# Altium PCB CPU_PCB1.PcbDoc
Units mil, origin at the board's own origin, x right, y up, seen from the top; angles counter-clockwise.
Board outline 1775 x 1235 mil, 2 copper layers (Top Layer, Bottom Layer); 13 components, 48 nets, 106 pads, 21 vias.
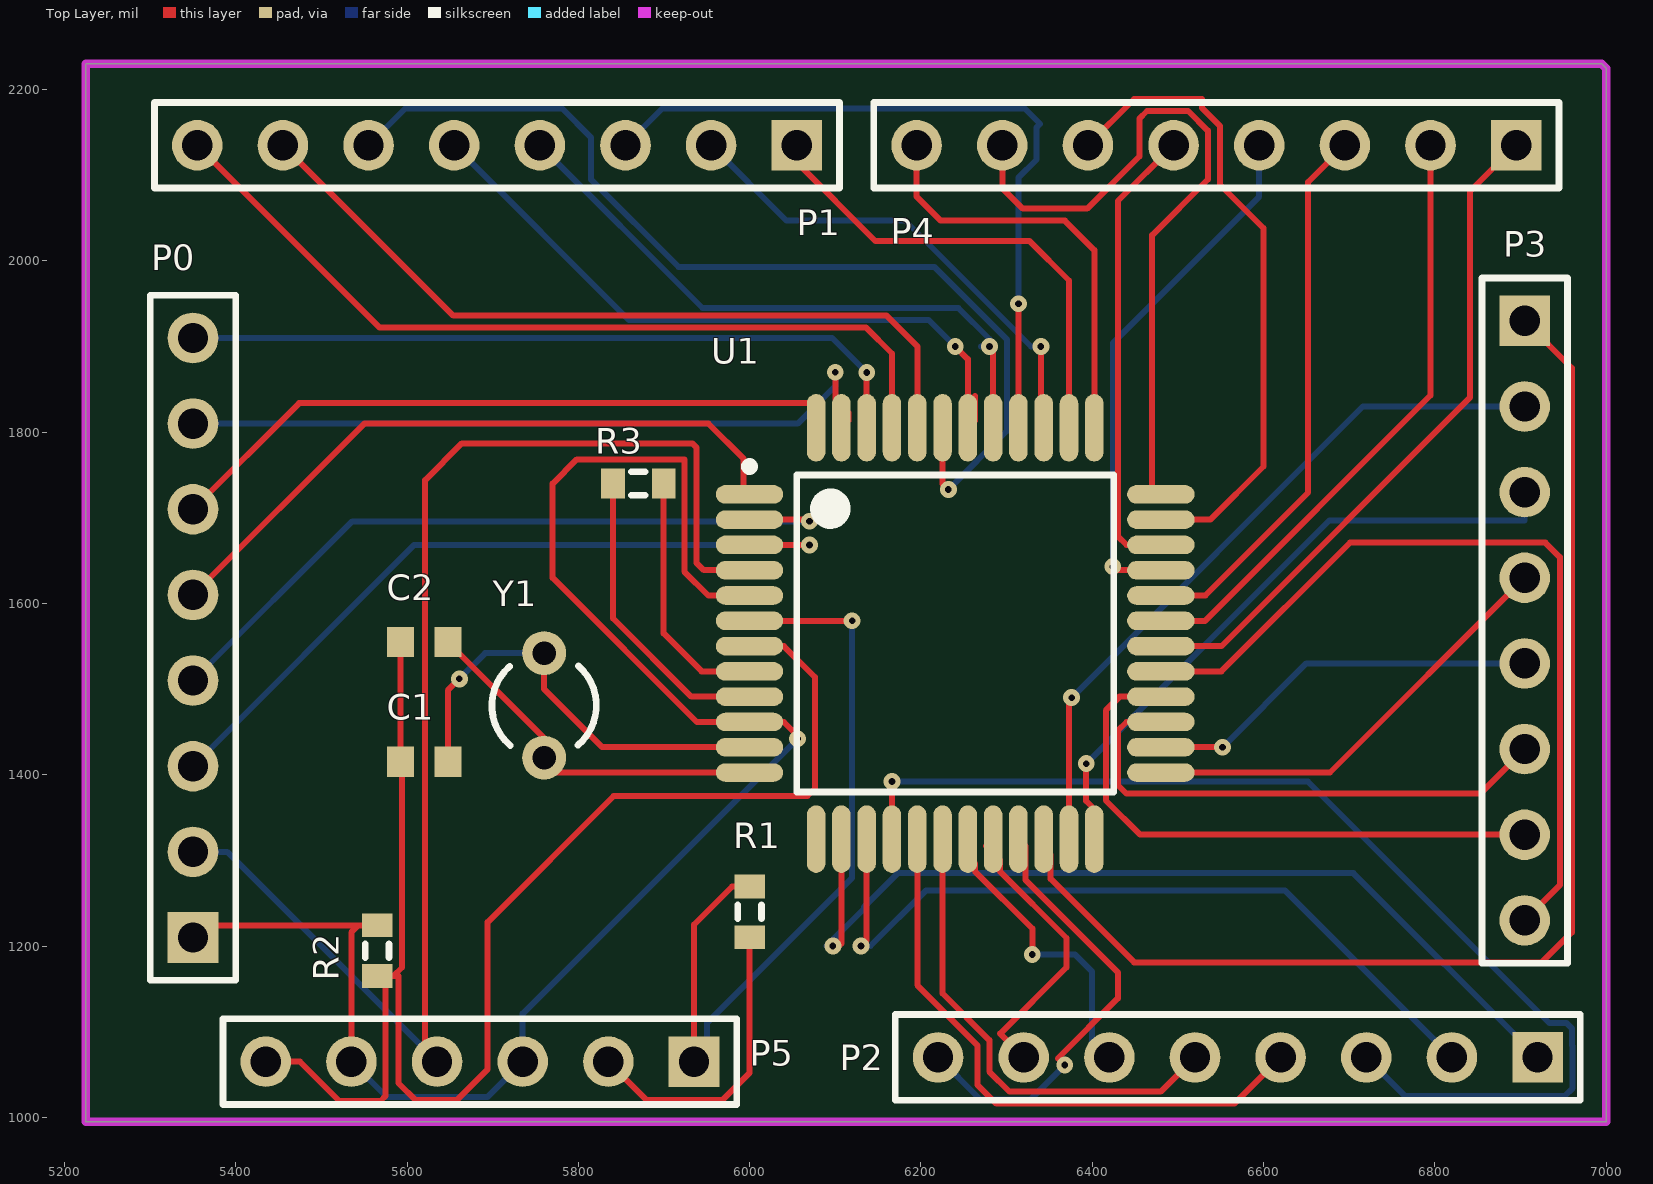
[diagram p0: Top Layer view]
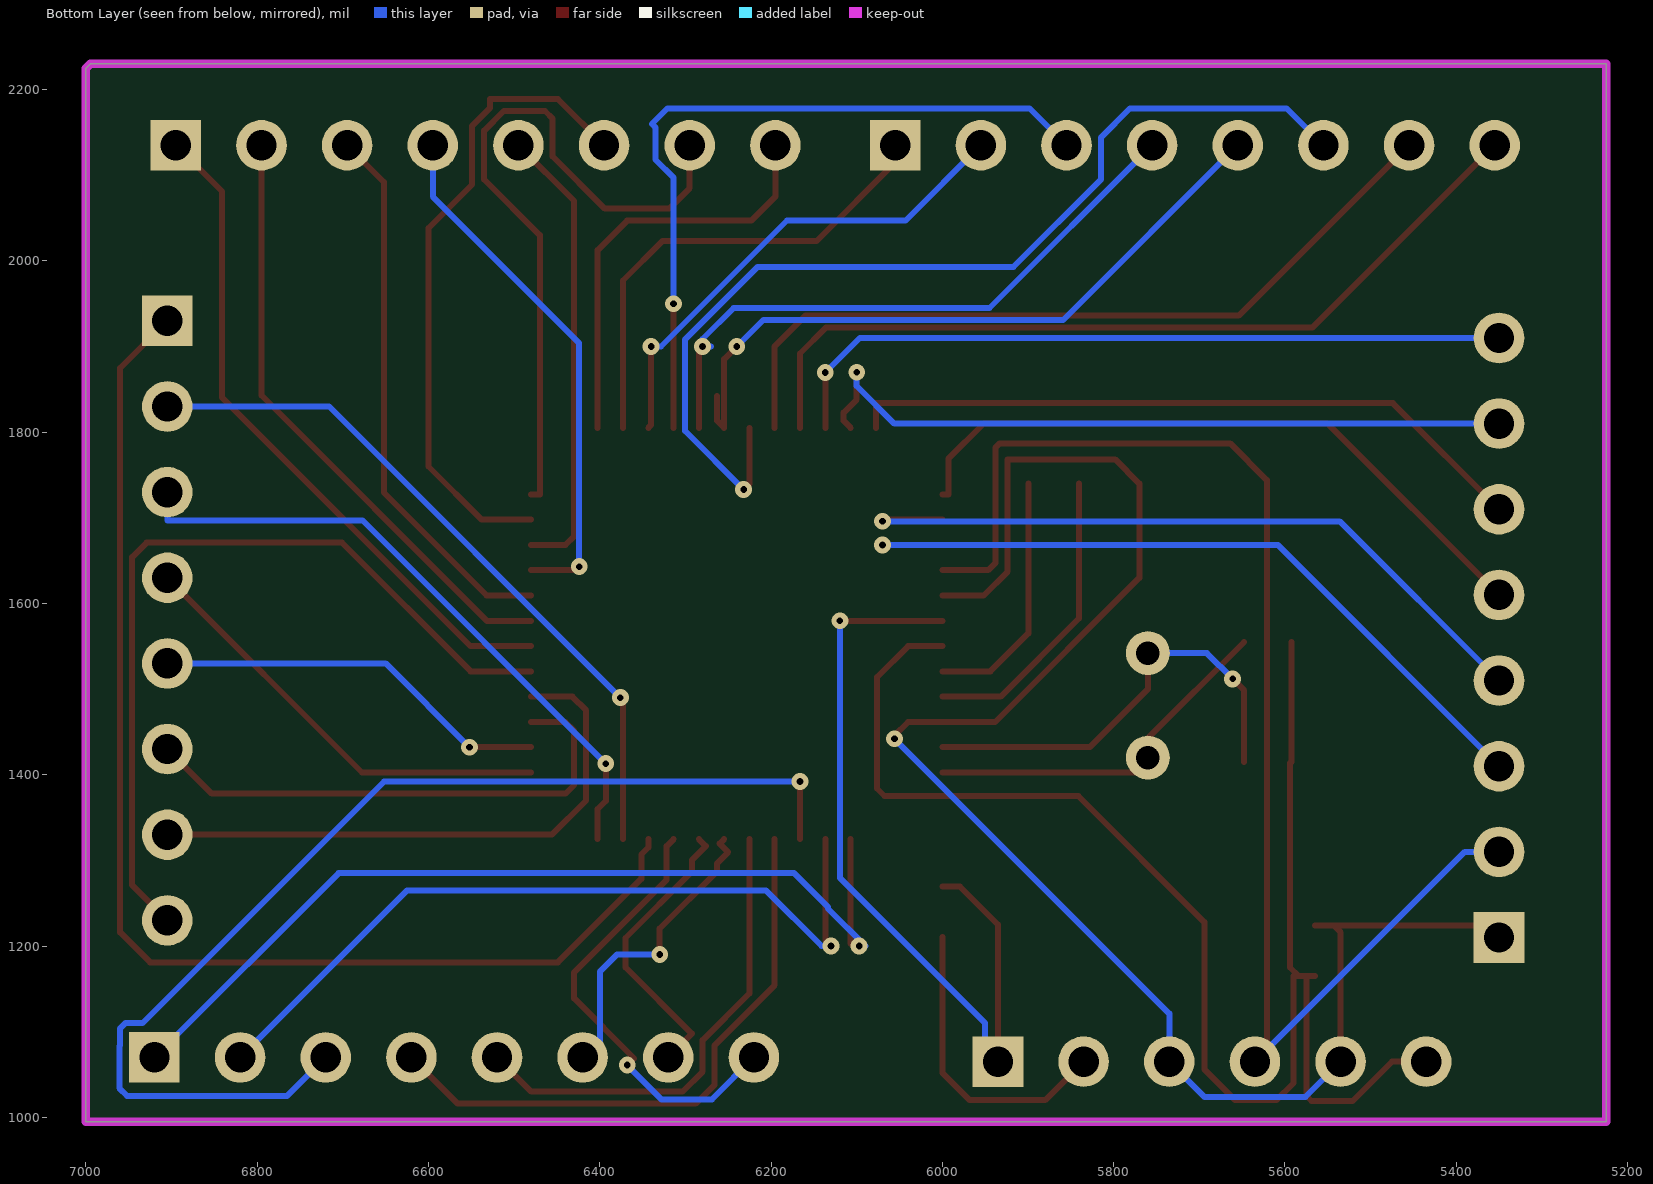
[diagram p1: Bottom Layer view, seen from below]

## Layer stack, top to bottom
Top Solder: solder mask 0.4, Solder Resist, Dk 3.5
Top Layer: signal copper 1.4
Dielectric 1: dielectric 12.6, FR-4, Dk 4.8
Bottom Layer: signal copper 1.4
Bottom Solder: solder mask 0.4, Solder Resist, Dk 3.5

## Board outline
5225,995 7000,995 7000,2225 6995,2230 5225,2230

## Design rules (kind name [scope] priority, off if disabled: settings)
Clearance [All] p1: gap=7
PolygonConnect [All] p1: connectstyle=Relief reliefconductorwidth=10 reliefentries=4 polygonreliefangle="90 Angle" airgapwidth=10
RoutingVias [All] p1: holewidth=7.87 width=19.68 viastyle="Through Hole" minholewidth=7.87 minwidth=19.68 maxholewidth=7.87 maxwidth=19.68
SolderMaskExpansion [All] p1: expansion=4
Width [All] p1: maxlimit=20 minlimit=6 preferedwidth=7
30 further rules are at their usual default settings.

## Components (designator, comment, footprint, x,y, rotation, side; value= is the part's Value field where it differs from the comment)
C1 "Cap Semi" 1608[0603] 5620,1415 r0 top
C2 "Cap Semi" 1608[0603] 5620,1555 r0 top
P0 "Header 8" HDR1X8 5350,1210 r90 top
P1 "Header 8" HDR1X8 6055,2135 r180 top
P2 "Header 8" HDR1X8 6920,1070 r180 top
P3 "Header 8" HDR1X8 6905,1930 r270 top
P4 "Header 8" HDR1X8 6895,2135 r180 top
P5 "Header 6" HDR1X6 5935,1065 r180 top
R1 "Res3" J1-0603 6000,1240 r90 top
R2 "Res3" J1-0603 5565,1194.53 r90 top
R3 "Res3" J1-0603 5870,1740 r0 top
U1 "S3F8S19" QFP75P1335X1335X230-48N 6240,1565 r0 top
Y1 "XTAL" R38 5760,1481.02 r0 top

## Footprints (in the part's own frame and the unit in brackets; to place one, negate y for a bottom-side part, rotate by r counter-clockwise, add the part's x,y. Pads: shape width x height; smd on the part's side, far side on the other; paste and mask are expansions set on the pad)
1608[0603] [mm] "Chip Capacitor, Body 1.6x0.8mm, IPC High Density"
  rect 0.8x0.9 smd: 1(-0.7,0) 2(0.7,0)
  body extent -0.87,-0.48 0.87,0.48, height 1.3
HDR1X6 [mm] "Connector; Header; 6 Position"
  rect 1.5x1.5 hole 0.9: 1(0,0)
  round 1.5 hole 0.9: 2(2.54,0) 3(5.08,0) 4(7.62,0) 5(10.16,0) 6(12.7,0)
  silkscreen extent -1.27,-1.27 13.97,1.27
HDR1X8 [mm] "Connector; Header; 8 Position"
  rect 1.5x1.5 hole 0.9: 1(0,0)
  round 1.5 hole 0.9: 2(2.54,0) 3(5.08,0) 4(7.62,0) 5(10.16,0) 6(12.7,0) 7(15.24,0) 8(17.78,0)
  silkscreen extent -1.27,-1.27 19.05,1.27
J1-0603 [mm] "Chip Resistor, Body 1.6x0.8mm, IPC High Density"
  rect 0.7x0.9 smd: 1(-0.75,0) 2(0.75,0)
  silkscreen extent -0.2,-0.35 0.2,0.35, body extent -0.85,-0.48 0.85,0.48, height 0.9
QFP75P1335X1335X230-48N [mm] "QFP, 48-Leads, Body 10.00x10.00mm, Pitch 0.75mm, IPC Medium Density"
  oval 2x0.55 smd: 1(-6.1,4.125) 2(-6.1,3.375) 3(-6.1,2.625) 4(-6.1,1.875) 5(-6.1,1.125) 6(-6.1,0.375) 7(-6.1,-0.375) 8(-6.1,-1.125) 9(-6.1,-1.875) 10(-6.1,-2.625) 11(-6.1,-3.375) 12(-6.1,-4.125) 25(6.1,-4.125) 26(6.1,-3.375) 27(6.1,-2.625) 28(6.1,-1.875) 29(6.1,-1.125) 30(6.1,-0.375) 31(6.1,0.375) 32(6.1,1.125) 33(6.1,1.875) 34(6.1,2.625) 35(6.1,3.375) 36(6.1,4.125)
  oval 0.55x2 smd: 13(-4.125,-6.1) 14(-3.375,-6.1) 15(-2.625,-6.1) 16(-1.875,-6.1) 17(-1.125,-6.1) 18(-0.375,-6.1) 19(0.375,-6.1) 20(1.125,-6.1) 21(1.875,-6.1) 22(2.625,-6.1) 23(3.375,-6.1) 24(4.125,-6.1) 37(4.125,6.1) 38(3.375,6.1) 39(2.625,6.1) 40(1.875,6.1) 41(1.125,6.1) 42(0.375,6.1) 43(-0.375,6.1) 44(-1.125,6.1) 45(-1.875,6.1) 46(-2.625,6.1) 47(-3.375,6.1) 48(-4.125,6.1)
  silkscreen extent -6.22,-4.7 4.7,5.07, body extent -5,-5 5,5, height 2.3
R38 [mm] "Crystal, Thru-Hole; 2 Leads; Body 3.1 x 8.2 mm (Dia.xH)"
  round 1.3 hole 0.7: 1(0,1.55) 2(0,-1.55)
  silkscreen extent -1.55,-1.19 1.55,1.17

## Part data
C1 C2: "Capacitor (Semiconductor SIM Model)"
P0 P1 P2 P3 P4: "Header, 8-Pin"
P5: "Header, 6-Pin"
R1 R2 R3: "Resistor"
Y1: "Crystal Oscillator"

## Via types
v1: diameter 19.68, hole 7.87, Top Layer to Bottom Layer, 21 vias

## Nets (pads, with @x,y where several pads share a name; then routed paths per layer and width w, separated by ;. In a path a pad name is that pad's centre, name@x,y a point inside that pad or via, vN(x,y) a via of type N, cw(c..) or ccw(c..) an arc to the next point about the centre after c; other vN are vias at no path point)
BUZZER: P0.1 P5.3 P5.5 R2.2 U1.5 U1.10 | length 1987.3
  Top Layer w7: P0.1 5364.06,1224.06 5543.06,1224.06 ; P5.5 5535,1216 5543.06,1224.06 ; R2.2 5543.06,1224.06 ; U1.5 5951.71,1609.29 5923.81,1637.19 5923.81,1768.22 5798.22,1768.22 5770,1740 5770,1630 5938.35,1461.65 U1.10 6040,1461.65 6056,1445.65 v1(6056,1442)
  Bottom Layer w7: P5.5 5576,1024 5694,1024 P5.3 5735,1121 v1(6056,1442)
GND: C1.1 C2.1 P5.6 R2.1 U1.7 | length 1813.9
  Top Layer w7: P5.6 5475,1065 5521,1019 5569,1019 5575.03,1025.03 R2.1@5575.03,1165 ; R2.1 R2.1@5575.03,1165 ; C2.1 C1.1 5594,1413.44 5594,1175 5584,1165 ; U1.7 6040,1550.24 6076.34,1513.89 6076.34,1384 6067.51,1375.16 5841.16,1375.16 5694,1228 5694,1056 5658,1020 5610,1020 5590,1040 5590,1165 5584,1165 ; R2.1@5575.03,1165 5584,1165
NetP0_6: P0.6 U1.48 | length 807.8
  Top Layer w7: P0.6 5474,1834 6077.6,1834 U1.48
NetP0_7: P0.7 U1.47 | length 858.9
  Top Layer w7: v1(6100,1870) 6100,1838.03 6115.33,1822.7 6115.33,1813.36 U1.47
  Bottom Layer w7: P0.7 6056.13,1810 6100,1853.87 v1(6100,1870)
NetP0_8: P0.8 U1.46 | length 867.9
  Top Layer w7: U1.46 v1(6136.65,1869.73)
  Bottom Layer w7: P0.8 6096.38,1910 v1(6136.65,1869.73)
NetP1_1: P1.1 U1.38 | length 567
  Top Layer w7: P1.1 6055,2115 6147,2023 6327,2023 6372.87,1977.13 U1.38
NetP1_2: P1.2 U1.39 | length 578.6
  Top Layer w7: v1(6340,1900) 6340,1808.5 U1.39
  Bottom Layer w7: P1.2 6042.77,2047.23 6181.33,2047.23 6328.57,1900 v1(6340,1900)
NetP1_3: P1.3 U1.40 | length 874.5
  Top Layer w7: U1.40 v1(6313.82,1950)
  Bottom Layer w7: P1.3 5898,2178 6321,2178 6339,2160 6335.03,2156.03 6335.03,2118.42 6313.82,2097.21 v1(6313.82,1950)
NetP1_4: P1.4 U1.41 | length 734.1
  Top Layer w7: v1(6280,1900) 6284.29,1895.71 U1.41
  Bottom Layer w7: P1.4 5945,1945 6243.77,1945 6280,1908.77 v1(6280,1900) 6270,1900
NetP1_5: P1.5 U1.42 | length 824.1
  Top Layer w7: v1(6240,1900) 6254.76,1885.24 U1.42 6262.97,1813.36 6262.97,1842.54
  Bottom Layer w7: P1.5 5859,1931 6209,1931 v1(6240,1900)
NetP1_6: P1.6 U1.43 | length 1182.2
  Top Layer w7: U1.43 6225.24,1739.76 v1(6232,1733)
  Bottom Layer w7: P1.6 5598,2178 5780.97,2178 5814.97,2144 5814.97,2094.97 5916.94,1993 6215.77,1993 6300.34,1908.43 6300.34,1801.34 v1(6232,1733)
NetP1_7: P1.7 U1.44 | length 933.1
  Top Layer w7: P1.7 5654,1936 6160.01,1936 6195.71,1900.31 U1.44
NetP1_8: P1.8 U1.45 | length 998.6
  Top Layer w7: P1.8 5568,1922 6136,1922 6166.18,1891.82 U1.45
NetP3_4: P3.4 U1.25 | length 519
  Top Layer w7: U1.25 6677.6,1402.6 P3.4
NetP3_5: P3.5 U1.26 | length 465.4
  Top Layer w7: U1.26 v1(6552.25,1432.13)
  Bottom Layer w7: v1(6552.25,1432.13) 6650.13,1530 P3.5
NetP3_6: P3.6 U1.27 | length 618.6
  Top Layer w7: U1.27 6440,1461.65 6430,1451.65 6430,1388 6440,1378 6853,1378 P3.6
NetP3_7: P3.7 U1.28 | length 681.6
  Top Layer w7: U1.28 6432,1491.18 6416,1475.18 6416,1369.95 6455.95,1330 P3.7
NetP3_8: P3.8 U1.29 | length 976.1
  Top Layer w7: U1.29 6550.71,1520.71 6701,1671 6929,1671 6946,1654 6946,1271 P3.8
NetP4_1: P4.1 U1.30 | length 798.1
  Top Layer w7: U1.30 6551,1550.24 6841,1840.24 6841,2081 P4.1
NetP4_2: P4.2 U1.31 | length 715.9
  Top Layer w7: U1.31 6531.76,1579.76 6795,1843 P4.2
NetP4_3: P4.3 U1.32 | length 645.1
  Top Layer w7: U1.32 6532,1609.29 6652,1729.29 6652,2092 P4.3
NetP4_4: P4.4 U1.33 | length 620.7
  Top Layer w7: v1(6424,1643) 6428.18,1638.82 U1.33
  Bottom Layer w7: v1(6424,1643) 6424,1904 6595,2075 P4.4
NetP4_5: P4.5 U1.34 | length 537.9
  Top Layer w7: U1.34 6440,1668.35 6430,1678.35 6430,2070 P4.5
NetP4_6: P4.6 U1.35 | length 759.8
  Top Layer w7: P4.6 6449.03,2189.03 6528,2189.03 6528,2178.83 6549.03,2157.8 6549.03,2089.2 6600,2038.23 6600,1760 6537.87,1697.87 U1.35
NetP4_7: P4.7 U1.36 | length 844.2
  Top Layer w7: P4.7 6295,2085 6319,2061 6394,2061 6454.97,2121.97 6454.97,2166 6464,2175.03 6512,2175.03 6535.03,2152 6535.03,2095 6470,2029.97 6470,1727.4 U1.36
NetP4_8: P4.8 U1.37 | length 500.7
  Top Layer w7: P4.8 6195,2075 6223,2047 6368,2047 6402.4,2012.6 U1.37
NetP5_2: P5.2 R1.1 | length 355.4
  Top Layer w7: P5.2 5880,1020 5968,1020 6000,1052 R1.1
NetR3_1: R3.1 U1.9 | length 354.6
  Top Layer w7: R3.1 5840.47,1582.72 5932.01,1491.18 U1.9
NetR3_2: R3.2 U1.8 | length 293.6
  Top Layer w7: R3.2 5899.53,1565.18 5944,1520.71 U1.8
NRESET: U1.13
P0.2: P0.3 U1.3 | length 897.2
  Top Layer w7: U1.3 v1(6070,1668.35)
  Bottom Layer w7: P0.3 5608.35,1668.35 v1(6070,1668.35)
P0.3: P0.4 U1.2 | length 868
  Top Layer w7: U1.2 6068.13,1697.87 v1(6070,1696)
  Bottom Layer w7: P0.4 5536,1696 v1(6070,1696)
P0.4: P0.5 U1.1 | length 791.3
  Top Layer w7: P0.5 5550,1810 5952,1810 5993,1769 5993,1727.4 U1.1
P2.0.0: P2.1 U1.14 | length 1095.6
  Top Layer w7: v1(6097.13,1200) 6104.25,1200 6107.13,1202.87 U1.14
  Bottom Layer w7: v1(6097.13,1200) 6090.2,1200 6090,1200.2 6133.66,1243.86 6133.66,1245.66 6173,1285 6705,1285 P2.1
P2.0.1: P2.2 U1.15 | length 925.3
  Top Layer w7: v1(6130,1200) 6136.65,1206.65 U1.15
  Bottom Layer w7: v1(6130,1200) 6141,1200 6206,1265 6625,1265 P2.2
P2.0.2: P2.3 U1.16 | length 1314.2
  Top Layer w7: U1.16 v1(6166.18,1392.13)
  Bottom Layer w7: v1(6166.18,1392.13) 6651.87,1392.13 6933.97,1110.03 6953.88,1110.03 6960.03,1103.88 6960.03,1083.97 6961,1083 6961,1034 6952,1025 6765,1025 P2.3
P2.0.3: P2.4 U1.17 | length 701.5
  Top Layer w7: U1.17 6195.71,1154.29 6265.97,1084.03 6265.97,1038 6288,1015.97 6565.97,1015.97 P2.4
P2.0.4: P2.5 U1.18 | length 560.4
  Top Layer w7: U1.18 6225.24,1144.76 6279.97,1090.03 6279.97,1053.42 6303.42,1029.97 6479.97,1029.97 P2.5
P2.0.5: P2.6 U1.19 | length 366.7
  Top Layer w7: U1.19 6260,1319.61 6250,1309.61 6262.97,1296.64 6262.97,1287.46 6330,1220.43 v1(6330,1190)
  Bottom Layer w7: v1(6330,1190) 6380,1190 6400,1170 6400,1070 P2.6@6410,1060
P2.0.6: P2.7 U1.20 | length 340.6
  Top Layer w7: U1.20 6276.09,1316.64 6292.49,1300.24 6292.49,1286.91 6370,1209.4 6370,1175.22 6292.49,1097.71 6320,1070.2 P2.7
P2.0.7: P2.8 U1.21 | length 529.1
  Top Layer w7: U1.21 6322.02,1316.64 6322.02,1277.18 6430,1169.2 6430,1138.94 6360.03,1068.97 v1(6368,1061)
  Bottom Layer w7: P2.8 6269,1021 6328,1021 v1(6368,1061)
"P3 0": P3.1 U1.22 | length 1449.9
  Top Layer w7: U1.22 6343.35,1315.11 6351.55,1306.91 6351.55,1278.45 6449,1181 6925,1181 6960,1216 6960,1875 P3.1
"P3 1": P3.2 U1.23 | length 836.5
  Top Layer w7: U1.23 6372.87,1392.44 6372.66,1392.66 6372.66,1486.66 v1(6376,1490)
  Bottom Layer w7: v1(6376,1490) 6716,1830 P3.2
"P3 2": P3.3 U1.24 | length 754.7
  Top Layer w7: v1(6393,1413) 6393,1369.4 6402.4,1360 U1.24
  Bottom Layer w7: v1(6393,1413) 6677,1697 6905,1697 P3.3
SDAT: P0.2 P5.4 U1.4 | length 1608.3
  Top Layer w7: P5.4 5621,1079 5621,1744 5664,1787 5933.03,1787 5937.81,1782.22 5937.81,1647.45 5946.44,1638.82 U1.4
  Bottom Layer w7: P0.2 5390,1310 P5.4
VDD: P5.1 R1.2 U1.6 | length 954.5
  Top Layer w7: P5.1 5935,1225 5979.53,1269.53 R1.2 ; U1.6 v1(6119.66,1579.76)
  Bottom Layer w7: P5.1 5950,1080 5950,1110 6119.66,1279.66 v1(6119.66,1579.76)
XIN: C1.2 U1.11 Y1.1 | length 524
  Top Layer w7: C1.2 5647.56,1498.56 v1(5661,1512) ; Y1.1 5760,1500 5827.87,1432.13 U1.11
  Bottom Layer w7: v1(5661,1512) 5691.05,1542.05 Y1.1
XOUT: C2.2 U1.12 Y1.2 | length 438.8
  Top Layer w7: C2.2 5760,1442.56 Y1.2 5760,1402.6 U1.12

## Keep-outs
Keep-Out Layer:
  lines w10: 5225,995 5225,2230 6975,2230 6995,2230 7000,2225 7000,995 5225,995